# Allegro board IN-C01-WDS V1.5.brd
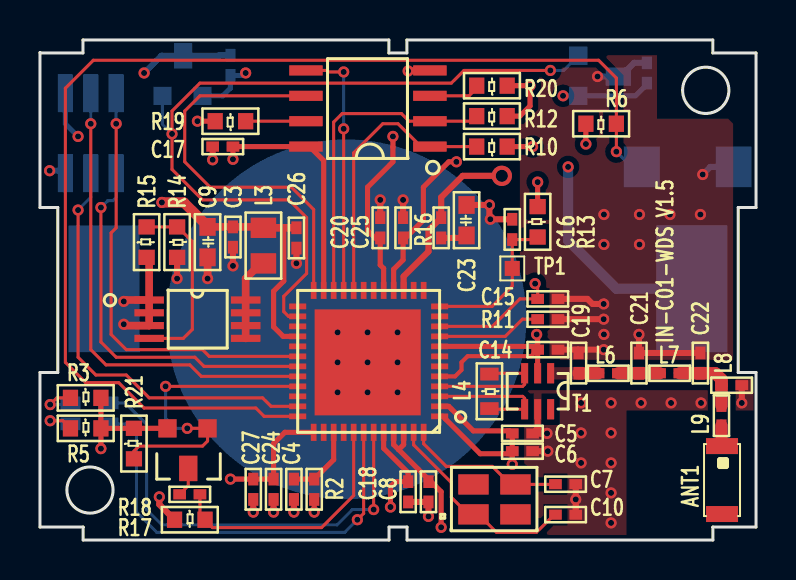
[diagram p0: board, top side]
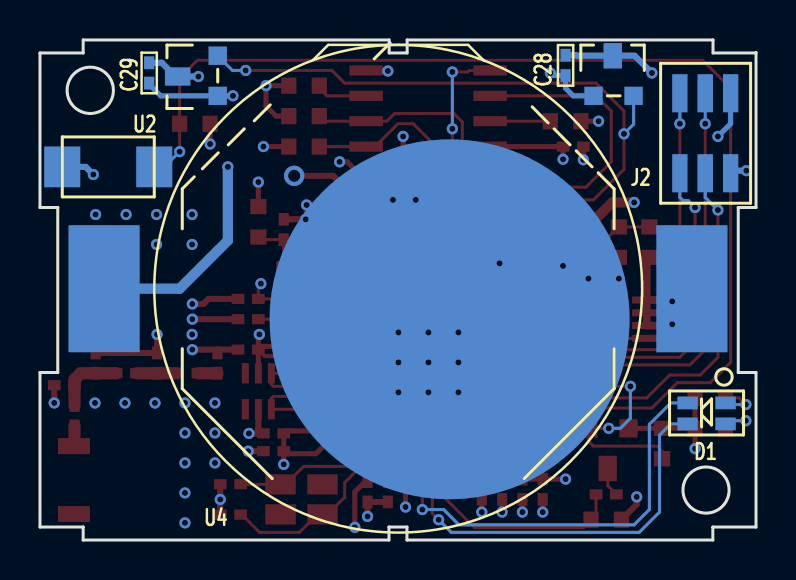
[diagram p1: board, bottom side, seen from below]

Outline 35.81 x 25.02 mm; copper layers: TOP, GND, PWR, BOTTOM. Coordinates in mm from the lower left corner of the outline.
Outline path: circle c2.5,2.5 r1.15 ; circle c33.3,22.5 r1.16 ; 33.65,25.02 18.35,25.02 18.35,24.37 17.45,24.37 17.45,25.02 2.15,25.02 2.15,24.37 0.01,24.37 0,24.38 0,16.64 0.89,16.64 0.89,8.38 0,8.38 0,0.65 2.15,0.65 2.16,0.64 2.16,0 17.46,0 17.46,0.65 18.36,0.65 18.36,0 33.66,0 ; 33.65,25.02 33.65,24.37 35.8,24.37 35.81,24.36 35.81,16.64 34.92,16.64 34.92,8.38 35.81,8.38 35.81,0.65 33.66,0.65 33.66,0.64 33.66,0

## Design rules (mm)
nets with their own width: min track width 0.254; nets +3.3V
nets with their own width: min track width 0.305; nets GND

## Placement (name value [footprint] x y rotation side)
ANT1  2540AT18B100  [AT18B100]  34.11 4.7 270 top
C3  0.1uF-SC0402  [SC0402]  9.65 15.67 270 top
C4  10nF-SC0402  [SC0402]  12.7 3.05 270 top
C5  10nF-SC0402  [SC0402]  23.62 5.33 0 top
C6  10nF-SC0402  [SC0402]  23.62 4.45 0 top
C7  6pF-SC0402  [SC0402]  25.78 2.79 0 top
C8  8pF-SC0402  [SC0402]  19.43 2.92 270 top
C9  2.2uF-SC0603  [SC0603]  8.38 14.9 270 top
C10  6pF-SC0402  [SC0402]  25.78 1.27 0 top
C14  8pF-SC0402  [SC0402]  25.91 9.53 180 top
C15  10nF-SC0402  [SC0402]  25.91 12.06 180 top
C16  0.1uF-SC0402  [SC0402]  23.62 16.05 270 top
C17  0.1uF-SC0402  [SC0402]  9.65 19.68 180 top
C18  10nF-SC0402  [SC0402]  18.41 2.92 270 top
C19  1pF-SC0402  [SC0402]  26.94 8.34 90 top
C20  1uF-SC0402  [SC0402]  17.02 15.11 90 top
C21  1pF-SC0402  [SC0402]  29.96 8.34 90 top
C22  1pF-SC0402  [SC0402]  33.03 8.34 90 top
C23  2.2uF-SC0603  [SC0603]  21.34 16 90 top
C24  0.1uF-SC0402  [SC0402]  11.68 3.05 270 top
C25  0.1uF-SC0402  [SC0402]  18.16 15.11 90 top
C26  0.1uF-SC0402  [SC0402]  12.83 15.62 270 top
C27  0.1uF-SC0402  [SC0402]  10.67 3.05 270 top
C28  0.1uF-SC0402  [SC0402]  9.53 23.24 90 bottom
C29  0.1uF-SC0402  [SC0402]  30.35 22.86 90 bottom
D1  -  [LED_TWO]  1.52 6.86 180 bottom
J2  CONN PCB 6  [CON2X3_127]  1.27 22.35 0 bottom
L3  120omh  [SL0805]  11.18 14.73 90 top
L4  3.3nH-SL0603  [L0603]  22.48 7.44 270 top
L6  2.7nH-SL0402  [L0402]  27.91 8.34 0 top
L7  2.7nH-SL0402  [L0402]  30.99 8.34 0 top
L8  1.5nH-SL0402  [L0402]  35.1 7.75 180 top
L9  2.0nH-SL0402  [L0402]  34.09 6.73 270 top
NOREF  -  []  31.24 9.91 270 bottom
Q1  IRF7604  [USOIC-8]  7.87 11.05 0 top
Q2  SI2309CDS  [SOT-23]  8.38 5.59 180 top
R2  10R-SR0402  [SR0402]  13.72 2.03 90 top
R3  1K-SR0603  [SR0603]  2.29 7.11 0 top
R5  1K-SR0603  [SR0603]  2.29 5.59 0 top
R6  10K-SR0603  [SR0603]  28.07 20.83 180 top
R10  100K-SR0603  [SR0603]  22.61 19.68 180 top
R11  180K-SR0402  [SR0402]  25.91 11.05 180 top
R12  100K-SR0603  [SR0603]  22.61 21.21 180 top
R13  100K-SR0603  [SR0603]  24.89 15.92 90 top
R14  100K-SR0603  [SR0603]  6.86 14.9 270 top
R15  100K-SR0603  [SR0603]  5.33 14.9 90 top
R16  1R-SR0402  [SR0402]  20.07 15.11 90 top
R17  100K-SR0603  [SR0603]  7.49 1.02 0 top
R18  180K-SR0402  [SR0402]  6.99 2.29 0 top
R19  100K-SR0603  [SR0603]  9.53 20.95 180 top
R20  100K-SR0603  [SR0603]  22.61 22.73 180 top
R21  100K-SR0603  [SR0603]  4.7 4.83 90 top
T1  -  [WE748421245]  24.89 7.44 0 top
TP1  GND  [SMD_SIG]  23.62 13.59 0 top
U1  ST32W108CC  [QFN48-20-284]  19.94 12.44 180 top
U2  BUTTON-2  [SKRKAEE010]  30.1 18.67 0 bottom
U4  J3  [BAT_CR2450]  17.91 12.57 180 bottom
U5  GD25Q16CTIGR  [SO8_240_50]  16.4 21.59 180 top
U6  TMR1302S  [SOT-23]  8.13 22.23 180 bottom
U7  TMR1302S  [SOT-23]  26.92 22.23 90 bottom
Y1  EPSON-24Mhz-10ppm-9pf  [XTAL-128-100]  22.73 2.03 90 top

## Library data of the parts
ANT1 = ANTENNA_1
C3-C10 C14-C29 = CAP NP
D1 = LED_TWO
J2 = CONN PCB 6
L3 = Inductor
L4 L6-L9 = INDUCTOR
Q1 = IRF76XX
Q2 = PMOS
R2 R3 R5 R6 R10-R21 = R
T1 = WE748421245_0
TP1 = TP-CR
U1 = ST32W108CC_1
U2 = BUTTON-2
U4 = J3
U5 = CAT25512
U6 U7 = Magnetic Switch_0
Y1 = xtal-32M

## Footprints (pads in the part's own frame, mm; a bottom-side part is the same pattern mirrored in y, then rotated)
AT18B100
  rect 0.8x1.6 smd: 1(0,0) 2(3.4,0)
BAT_CR2450
  round 18.001 smd: 1(2.58,-1.53)
  rect 3.556x6.35 smd: 2(14.7,0) 3(-14.7,0)
CON2X3_127
  rect 0.762x1.905 smd: 1(0,0) 2(0,4) 3(1.27,0) 4(1.27,4) 5(2.54,0) 6(2.54,4)
L0402
  rect 0.635x0.508 smd: 1(0,0) 2(1.016,0)
L0603
  rect 0.635x0.914 smd: 1(-0.864,0) 2(0.864,0)
LED_TWO
  rect 1.016x0.635 smd: 1(0,0) 2(-1.9,0) 3(0,-1.05) 4(-1.9,-1.05)
QFN48-20-284
  rect 0.851x0.279 smd: 1(-0.05,6.25) 2(-0.05,5.75) 3(-0.05,5.25) 4(-0.05,4.75) 5(-0.05,4.25) 6(-0.05,3.75) 7(-0.05,3.25) 8(-0.05,2.75) 9(-0.05,2.25) 10(-0.05,1.75) 11(-0.05,1.25) 12(-0.05,0.75) 25(7.05,0.75) 26(7.05,1.25) 27(7.05,1.75) 28(7.05,2.25) 29(7.05,2.75) 30(7.05,3.25) 31(7.05,3.75) 32(7.05,4.25) 33(7.05,4.75) 34(7.05,5.25) 35(7.05,5.75) 36(7.05,6.25)
  rect 0.279x0.851 smd: 13(0.75,-0.05) 14(1.25,-0.05) 15(1.75,-0.05) 16(2.25,-0.05) 17(2.75,-0.05) 18(3.25,-0.05) 19(3.75,-0.05) 20(4.25,-0.05) 21(4.75,-0.05) 22(5.25,-0.05) 23(5.75,-0.05) 24(6.25,-0.05) 37(6.25,7.05) 38(5.75,7.05) 39(5.25,7.05) 40(4.75,7.05) 41(4.25,7.05) 42(3.75,7.05) 43(3.25,7.05) 44(2.75,7.05) 45(2.25,7.05) 46(1.75,7.05) 47(1.25,7.05) 48(0.75,7.05)
  rect 5.3x5.3 smd: 49(3.55,3.55)
SC0402
  rect 0.635x0.508 smd: 1(0,0) 2(1.016,0)
SC0603
  rect 0.889x0.813 smd: 1(-0.762,0) 2(0.762,0)
SKRKAEE010
  rect 1.803x2.032 smd: 1(0,0) 2(4.6,0)
SL0805
  rect 1.016x1.27 smd: 1(-0.889,0) 2(0.889,0)
SMD_SIG
  rect 0.75x0.75 smd: 1(0,0)
SO8_240_50
  rect 1.676x0.508 smd: 1(-3.1,1.905) 2(-3.1,0.635) 3(-3.1,-0.635) 4(-3.1,-1.905) 5(3.1,-1.905) 6(3.1,-0.635) 7(3.1,0.635) 8(3.1,1.905)
SOT-23
  rect 0.914x0.914 smd: 1(0,0) 2(2.005,0)
  rect 0.914x1.27 smd: 3(0.965,2.005)
SR0402
  rect 0.635x0.508 smd: 1(0,0) 2(1.016,0)
SR0603
  rect 0.762x0.813 smd: 1(-0.762,0) 2(0.762,0)
USOIC-8
  rect 1.473x0.356 smd: 1(-2.413,0.96) 2(-2.413,0.32) 3(-2.413,-0.32) 4(-2.413,-0.96) 5(2.413,-0.96) 6(2.413,-0.32) 7(2.413,0.32) 8(2.413,0.96)
WE748421245
  rect 0.35x1.016 smd: 1(0.65,0.9) 2(0,0.9) 3(-0.65,0.9) 4(-0.65,-0.9) 5(0,-0.9) 6(0.65,-0.9)
XTAL-128-100
  rect 1.016x1.524 smd: 1(-0.75,1.05) 2(-0.75,-1.05) 3(0.75,-1.05) 4(0.75,1.05)

## Nets
+1.2V: C18.1 C20.1 U1.17(VDD_CORE1) U1.44(VDD_CORE2)
+1.8V: C5.1 C6.1 C8.1 C14.2 C15.2 R2.1 R16.2 T1.2 U1.1(VDD_24M) U1.2(VDD_VCO) U1.5(VDD_RF) U1.8(VDD_IF) U1.10(VDD_PADSA) U1.15(VREG_OUT) U1.45(VDD_PRE) U1.46(VDD_SYNTH)
+3.3V: C3.1 C9.1 C17.1 C24.1 C25.1 C26.1 C27.1 C28.1 C29.1 J2.1 L3.2 Q2.2(S) R3.2 R5.2 R6.2 R10.1 R12.1 R13.2 R19.2 R20.1 R21.2 U1.16(VDD_PADS1) U1.23(VDD_PADS2) U1.28(VDD_PADS3) U1.37(VDD_PADS4) U5.8(VCC) U6.1(VCC) U7.1(VCC)
+3V: Q1.1(S1) Q1.2(S2) Q1.3(S3) R15.1 U4.2 U4.3
GND: C3.2 C4.2 C5.2 C6.2 C7.2 C8.2 C9.2 C10.2 C14.1 C15.1 C16.1 C17.2 C18.2 C19.2 C20.2 C21.2 C22.2 C23.2 C24.2 C25.2 C26.2 C27.2 C28.2 C29.2 J2.2 L8.1 R11.1 R14.2 R17.1 T1.5 U1.49(EPAD) U2.2 U4.1 U5.4(VSS) U6.3(GND) U7.3(GND)
VDD_MEM: C4.1 R2.2 U1.39(VDD_MEM)
ADC: R17.2 R18.2 U1.41(PB7)
ADC_CON: Q2.1(G) R21.1 U1.33(PC2/JTDO)
BIAS_R: R11.2 U1.9(BIAS_R)
BUTTON: R6.1 U1.36(PB0) U2.1
CLK: U1.24(PA2) U5.6(SCK)
CS: R10.2 U1.20(PB4) U5.1(/CS)
LED1: D1.2 U1.43(PB5)
LED2: D1.4 U1.42(PB6)
MISO: R12.2 U1.22(PA1) U5.2(SO)
MOSI: U1.21(PA0) U5.5(SI)
NRST: C16.2 R13.1 TP1.1 U1.12(NRST)
RF_N: L4.1 T1.3 U1.4(RF_N)
RF_P: L4.2 T1.4 U1.3(RF_P)
RXD: J2.6 U1.31(PB2)
SIGNAL: U1.26(PA4) U6.2(OUT) U7.2(OUT)
SWCLK: J2.3 U1.32(JTCK)
SWDIO: J2.4 U1.35(PC4/JTMS)
TXD: J2.5 U1.30(PB1)
X1: C10.1 U1.47(OSC_IN) Y1.1
X2: C7.1 U1.48(OSC_OUT) Y1.3
N288005: D1.3 R5.1
N288013: D1.1 R3.1
N295488: L3.1 Q1.5(D1) Q1.6(D2) Q1.7(D3) Q1.8(D4)
N427611: Q1.4(G) R14.1 R15.2
N430945: C23.1 R16.1
N497896: R19.1 U5.7(/HOLD)
N497906: R20.2 U5.3(/WP)
N505042: C19.1 L6.1 T1.1
N505056: C21.1 L6.2 L7.1
N505070: C22.1 L7.2 L8.2 L9.1
N505309: ANT1.1(FEED) L9.2
N5039380: Q2.3(D) R18.1

Pads without a net: ANT1 2; T1 6; U1 6 7 11 13 14 18 19 25 27 29 34 38 40; Y1 2 4

## Via types
v1: diameter 0.559, hole 0.305, TOP to BOTTOM, 92 vias
v2: diameter 1.016, hole 0.61, TOP to BOTTOM, 1 via

## Routing (per net, layer and track width the routed paths; a pad name or vN(x,y) marks a point on that pad's centre or on a via; arc(x,y) is an arc through that point)
+1.2V: length 33.2
  TOP w0.254: U1.44 17.19,4.59 18.41,3.37 C18.1 17.78,2.92 17.53,2.67 v1(17.53,1.65) ; U1.17 17.19,13.59 17.02,13.76 C20.1 16.76,15.11 16.38,15.49 16.38,17.65 17.65,18.92 17.65,19.66 17.65,19.66 v1(17.65,20.19)
  PWR w0.254: v1(17.65,20.19) 17.65,18.92 16.38,17.65 16.38,16.13 17.14,15.37 17.14,6.86 17.53,6.48 v1(17.53,1.65)
+1.8V: length 120.3
  TOP w0.152: v1(24.77,12.83) 24.89,12.7 C15.2 24,12.06 22.63,10.69 U1.10
  TOP w0.203: C14.2 24.57,9.2 21.39,9.2 21.08,8.89 21.08,8.51 20.76,8.19 U1.5
  TOP w0.254: v1(24.84,10.29) 24.89,10.24 C14.2 ; U1.1 20.15,6.19 22.02,4.32 23.5,4.32 C6.1 ; U1.8 24.73,9.69 C14.2 ; 17.94,4.52 19.43,3.03 C8.1 19.56,2.92 20.07,2.41 v1(20.07,0.64) ; 17.94,4.52 18.19,4.77 U1.46 ; 17.94,4.52 17.69,4.77 U1.45 ; C6.1 v1(23.62,3.78) ; C6.1 C5.1 23.5,5.46 21.67,5.46 20.45,6.69 U1.2 ; T1.2 C14.2 ; R2.1 v1(13.72,1.4)
  TOP w0.305: v2(23.1,18.22) 21.14,18.22 20.07,17.14 20.07,16.13 19.43,15.49 19.43,14.43 18.19,13.19 U1.15
  PWR w0.254: v1(24.77,12.83) 24.77,17.27 23.82,18.22 v2(23.1,18.22) ; v2(23.1,18.22) 23.1,11.29 22.86,11.05 22.86,5.08 23.62,4.32 v1(23.62,3.78) ; v2(23.1,18.22) 23.75,17.57 23.75,11.38 v1(24.84,10.29) ; v2(23.1,18.22) 20.51,18.22 18.92,16.64 18.92,1.65 18.39,1.12 17.25,1.12 16.51,0.38 14.73,0.38 v1(13.72,1.4) ; v2(23.1,18.22) 20.07,15.19 v1(20.07,0.64)
+3.3V: length 63.7
  TOP w0.254: v1(20.83,18.92) 20.45,18.92 19.18,17.65 19.18,16 18.29,15.11 C25.1 18.16,14.02 17.69,13.54 U1.16 ; v1(9.65,19.05) C17.1 U5.8 13.49,19.68 14.19,18.98 U1.23 ; R6.2 v1(27.3,19.81) ; U1.37 12.25,5.39 11.68,4.83 C24.1 C27.1 v1(9.53,3.05) ; R5.2 R21.2 Q2.2 ; R5.2 R3.2 ; R5.2 v1(3.05,4.57) ; R12.1 24,21.21 24.51,21.72 v1(24.51,22.73) R20.1 ; U1.28 12.16,10.19 11.68,10.67 11.68,12.45 12.19,12.95 12.19,15.62 ; R19.2 v1(7.87,20.95) ; R10.1 v1(24.64,19.68) ; R13.2 v1(24.89,17.91)
  TOP w0.381: C9.1 C3.1 11.13,15.67 L3.2 C26.1
  TOP w0.508: v1(6.1,16.89) 7.2,16.89 8.38,15.71 C9.1
  BOTTOM w0.254: v1(10.29,23.37) 10.16,23.24 C28.1 9.53,22.61 9.14,22.23 U6.1 ; J2.1 1.27,20.83 v1(1.91,20.19) ; v1(26.16,22.23) U7.1 29.78,22.23 30.35,22.8 C29.1
+3V: length 51
  TOP w0.381: Q1.1 Q1.2 Q1.3 4.26,10.73 v1(4.19,10.79) ; Q1.1 4.26,12.01 v1(4.19,11.94) ; Q1.1 5.46,14.02 5.33,14.14
  PWR w0.508: v1(4.19,10.79) v1(4.19,11.94) 4.19,13.84 5.08,14.73 5.08,19.94 6.86,21.72 25.53,21.72 26.42,20.83 v1(26.42,18.67)
  BOTTOM w0.508: v1(26.42,18.67) 26.42,14.99 28.83,12.57 U4.3
GND: length 42.1
  TOP w0.305: C19.2 26.94,9.5 26.91,9.53 ; C3.2 v1(9.65,13.72) ; C24.2 v1(11.68,1.4) ; 25.02,5.33 24.89,5.46 24.89,5.59 ; 25.02,5.33 v1(25.36,5.33) ; 25.02,5.33 C5.2 24.89,5.59 ; C26.2 v1(12.83,13.84) ; C16.1 v1(22.52,16.05) 22.48,16.09 v1(22.48,16.76) C23.2 ; v1(5.97,2.16) 5.97,1.78 R17.1 ; v1(28.19,9.53) 26.91,9.53 ; 26.91,9.53 C14.1 ; C15.1 27.38,12.06 27.64,11.81 v1(28.19,11.81) ; 18.16,16.13 v1(18.16,17.02) ; R11.1 v1(28.19,11.05) ; 17.02,16.13 v1(17.02,17.02) ; C6.2 v1(25.4,4.45) ; C18.2 C8.2 v1(19.43,1.18) ; v1(18.41,23.47) 18.44,23.5 U5.4 ; 24.89,5.59 24.89,6.54 ; C4.2 v1(12.7,1.4) ; v1(29.96,10.29) C21.2 C22.2 ; C17.2 v1(8.64,19.02) ; C27.2 v1(10.67,1.4) ; 6.86,14.14 v1(6.86,13.08) ; C7.2 v1(26.8,2.03) C10.2 ; L8.1 v1(35.1,6.86)
  TOP w0.381: 8.38,14.14 v1(8.38,13.08)
  BOTTOM w0.305: C28.2 8.99,24.26 8.96,24.23 U6.3 6.07,24.23 v1(5.21,23.37) ; v1(0.48,18.48) 1.14,18.48 J2.2 ; C29.2 29.72,23.88 29.03,23.19 U7.3 v1(27.89,23.19) ; v1(33.15,18.29) 33.53,18.67 U2.2
  vias: v1(14.88,10.39) v1(14.88,8.89) v1(14.88,7.39) v1(16.39,10.39) v1(16.39,8.89) v1(16.39,7.39) v1(17.89,10.39) v1(17.89,8.89) v1(17.89,7.39) v1(27.06,6.86) v1(27.06,5.36) v1(27.06,3.86) v1(28.21,16.29) v1(28.21,14.79) v1(28.21,10.29) v1(28.56,6.86) v1(28.56,5.36) v1(28.56,3.86) v1(28.56,2.36) v1(28.56,0.86) v1(29.98,16.29) v1(29.98,14.79) v1(30.06,6.86) v1(31.51,16.29) v1(31.56,6.86) v1(33.03,16.29) v1(33.06,6.86)
VDD_MEM: length 3.8
  TOP w0.254: C4.1 R2.2 14.69,4.02 U1.39
ADC: length 12.8
  TOP w0.152: 8,2.29 8,1.27 R17.2 8.26,0.99 8.62,0.62 14.08,0.62 15.69,2.23 U1.41
ADC_CON: length 15.4
  TOP w0.152: U1.33 v1(6.28,7.69) ; R21.1 4.7,4.45 4.95,4.7 8.13,4.7 8.38,4.95 Q2.1 v1(7.37,5.59)
  BOTTOM w0.152: v1(7.37,5.59) 6.79,5.59 6.28,6.1 v1(6.28,7.69)
BIAS_R: length 5.3
  TOP w0.152: R11.2 24.13,11.05 23.27,10.19 U1.9
BUTTON: length 60.2
  TOP w0.152: v1(28.83,19.43) R6.1 28.83,23.11 27.94,24 2.67,24 1.27,22.61 1.27,8.89 2.29,7.87 3.94,7.87 5.21,6.6 10.79,6.6 11.21,6.19 U1.36
  BOTTOM w0.152: U2.1 29.59,18.67 v1(28.83,19.43)
CLK: length 20.4
  TOP w0.152: U5.6 8,22.23 7.24,21.46 7.24,18.92 8.51,17.65 12.57,17.65 13.69,16.54 U1.24
CS: length 14.1
  TOP w0.152: R10.2 U5.1 19.05,19.68 17.91,20.83 17.14,20.83 15.69,19.37 U1.20
LED1: length 22.5
  TOP w0.152: U1.43 v1(16.69,1.52)
  BOTTOM w0.152: v1(16.69,1.52) 15.62,1.52 14.86,0.76 6.1,0.76 5.33,1.52 5.33,5.79 4.26,6.86 D1.2
LED2: length 21.7
  TOP w0.152: v1(15.88,1.02) 16.19,1.33 U1.42
  BOTTOM w0.152: v1(15.88,1.02) 15.24,0.38 5.84,0.38 4.83,1.4 4.83,5.24 4.26,5.81 D1.4
MISO: length 16
  TOP w0.152: R12.2 21.59,20.95 U5.2 18.46,20.95 18.08,21.34 15.11,21.34 14.69,20.91 U1.22
MOSI: length 12.8
  TOP w0.152: U5.5 14.34,23.5 14.42,23.42 v1(15.19,23.42) ; U1.21 v1(15.19,20.57)
  BOTTOM w0.152: v1(15.19,20.57) v1(15.19,23.42)
NRST: length 7.7
  TOP w0.152: U1.12 22.61,11.69 23.62,12.7 TP1.1 C16.2 24.77,15.03 24.89,15.16
RF_N: length 6.6
  TOP w0.152: U1.4 24.14,7.69 24.24,7.79 T1.3 22.52,8.34 L4.1
RF_P: length 6.6
  TOP w0.152: L4.2 22.51,6.54 24.24,6.54 24.24,7.09 24.14,7.19 U1.3
RXD: length 19.3
  TOP w0.152: v1(3.05,16.64) 3.05,9.91 3.81,9.14 7.75,9.14 8.2,8.69 U1.31
  BOTTOM w0.152: J2.6 3.81,17.14 3.64,16.98 3.39,16.98 v1(3.05,16.64)
SIGNAL: length 40.2
  TOP w0.152: v1(25.53,23.5) 21.21,23.5 20.57,22.86 8,22.86 6.6,21.46 v1(6.6,20.32) 6.6,18.54 8.13,17.02 12.45,17.02 13.34,16.13 13.34,13.34 12.19,12.19 12.19,11.43 12.43,11.19 U1.26
  BOTTOM w0.152: U6.2 6.12,20.8 v1(6.6,20.32) ; U7.2 26.19,23.5 v1(25.53,23.5)
SWCLK: length 23.7
  TOP w0.152: v1(2.54,20.83) 2.54,9.53 3.3,8.76 7.49,8.76 8.07,8.19 U1.32
  BOTTOM w0.152: v1(2.54,20.83) J2.3
SWDIO: length 21.5
  TOP w0.152: U1.35 11.56,6.69 11.13,7.11 5.46,7.11 4.32,8.26 2.79,8.26 1.91,9.14 v1(1.91,16.51)
  BOTTOM w0.152: v1(1.91,16.51) 2.54,17.14 J2.4
TXD: length 22
  TOP w0.152: v1(3.81,20.83) 3.81,15.62 3.56,15.37 3.56,10.29 4.32,9.53 8.13,9.53 8.46,9.19 U1.30
  BOTTOM w0.152: J2.5 v1(3.81,20.83)
X1: length 10.3
  TOP w0.152: U1.47 18.69,4.76 20.57,2.87 20.57,2.14 21.43,1.28 Y1.1 21.94,1.28 22.84,0.38 24.83,0.38 25.72,1.27 C10.1
X2: length 8
  TOP w0.152: C7.1 25.77,2.78 Y1.3 23.53,2.78 22.63,3.68 20.32,3.68 19.19,4.81 U1.48
N288005: length 2.3
  TOP w0.152: v1(0.51,5.97) 1.14,5.97 R5.1
  BOTTOM w0.152: v1(0.51,5.97) 1.36,5.97 D1.3
N288013: length 2.2
  TOP w0.152: v1(0.51,6.78) 0.84,7.11 R3.1
  BOTTOM w0.152: v1(0.51,6.78) 1.44,6.78 D1.1
N295488: length 4.2
  TOP w0.381: L3.1 11.05,13.84 10.29,13.08 10.29,10.09
N427611: length 9.3
  TOP w0.152: Q1.4 7.17,10.09 7.62,10.54 7.62,14.93 6.88,15.67 R14.1 R15.2
N430945: length 1.3
  TOP w0.305: C23.1 21.21,15.11 R16.1
N497896: length 3
  TOP w0.152: U5.7 R19.1
N497906: length 2.6
  TOP w0.152: U5.3 21.46,22.23 21.84,22.61 R20.2
N505042: length 1
  TOP w0.61: C19.1 L6.1
N505056: length 2.1
  TOP w0.61: L6.2 C21.1 L7.1
N505070: length 3.5
  TOP w0.61: L7.2 C22.1 33.78,8.34 34.09,8.04 L8.2 L9.1
N505309: length 1
  TOP w0.61: ANT1.1 34.09,4.73 L9.2
N5039380: length 1.5
  TOP w0.152: R18.1 7.42,2.72 Q2.3

## Copper pours and planes (outline as drawn; the poured copper is in the pictures)
+3.3V on PWR: 17.14,16.26 17.14,0.89 16.76,0.89 16.38,0.51 2.79,0.51 4.19,1.91 4.19,3.43 3.3,4.32 2.03,4.32 1.52,3.81 1.52,23.62 2.03,24.13 16.76,24.13 17.02,23.88 19.43,23.88 19.68,24.13 32.51,24.13 31.75,23.37 31.75,21.84 32.64,20.95 34.42,20.95 34.54,20.83 34.54,16.26 ; 2 cut-outs
GND on TOP: 24.89,0.25 24.89,3.17 24.13,3.94 21.84,3.94 21.46,4.32 21.46,11.05 24,13.59 24,23.62 24.64,24.26 30.86,24.26 30.86,21.08 34.42,21.08 34.67,20.83 34.67,9.02 23.5,9.02 23.5,7.49 33.4,7.49 33.4,6.48 29.34,6.48 29.34,0.25
GND on TOP: 34.8,8.13 34.8,6.48 35.69,6.48 35.69,8.13
GND on GND: 20.45,0.25 19.81,0.89 16.76,0.89 16.13,0.25 2.41,0.25 4.06,1.91 4.06,3.43 3.3,4.19 1.91,4.19 1.14,3.43 0.38,3.43 0.38,8.13 1.14,8.13 1.14,17.02 0.25,17.02 0.25,23.88 2.41,23.88 2.41,24.26 16.76,24.26 17.02,24 19.43,24 19.68,24.26 32.7,24.26 31.88,23.43 31.88,21.97 32.77,21.08 34.42,21.08 34.67,20.83 34.67,8.23 34.68,8.24 35.65,8.24 35.65,6.48 29.34,6.48 29.34,0.25
N505042 on TOP: 25.4,8.04 25.4,8.65 27.05,8.65 27.05,8.04

## Text on the board
Ref Des/Silkscreen Top: IN-C01-WDS V1.5
DEVICE_TYPE_TOP: FIGURE | SIZE | 0.3048 | 0.6096 | DRILL CHART: TOP to BOTTOM | ALL UNITS ARE IN MILLIMETERS | PLATED | QTY | 92 | 1
